# Altium PCB Direct FM modulator test.PcbDoc (part 1 of 2)
Units mm, origin at the board's own origin, x right, y up, seen from the top; angles counter-clockwise.
Board outline 52.5 x 20.32 mm, 4 copper layers (Top Layer, Layer 1, Layer 2, Bottom Layer), stack 1.501 mm thick; 46 components, 41 nets, 156 pads, 97 vias.
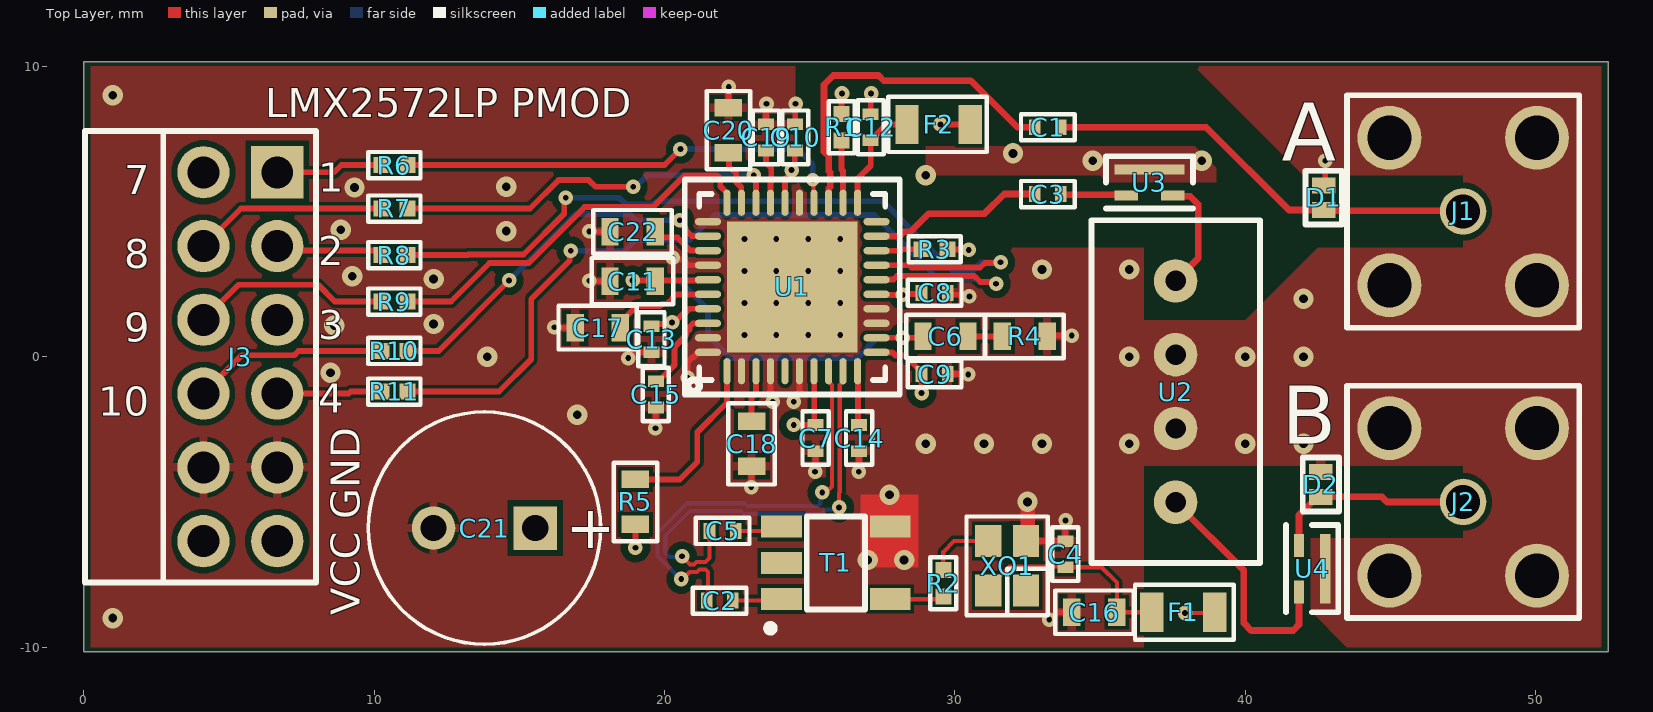
[diagram p0: Top Layer view]
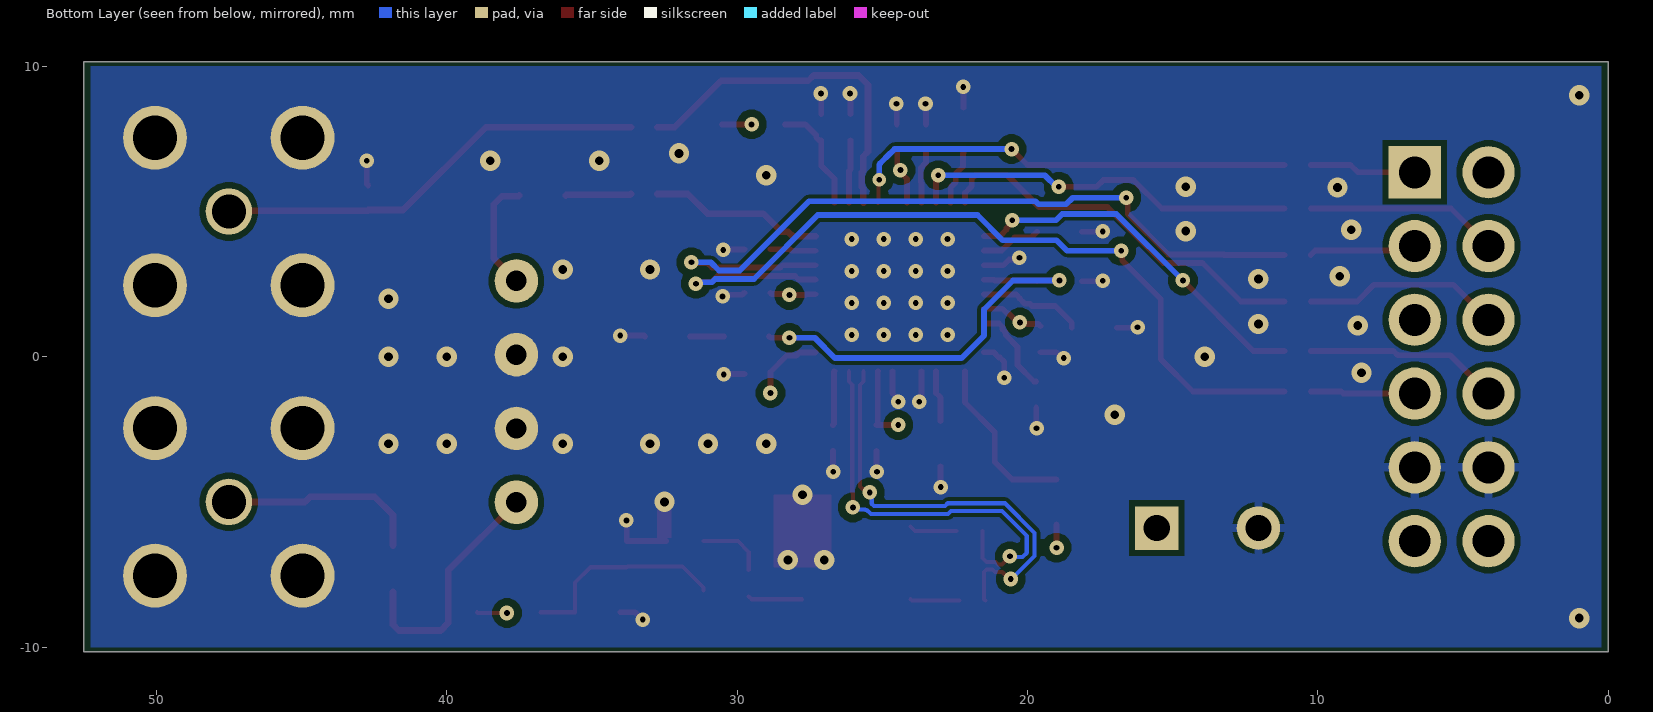
[diagram p1: Bottom Layer view, seen from below]
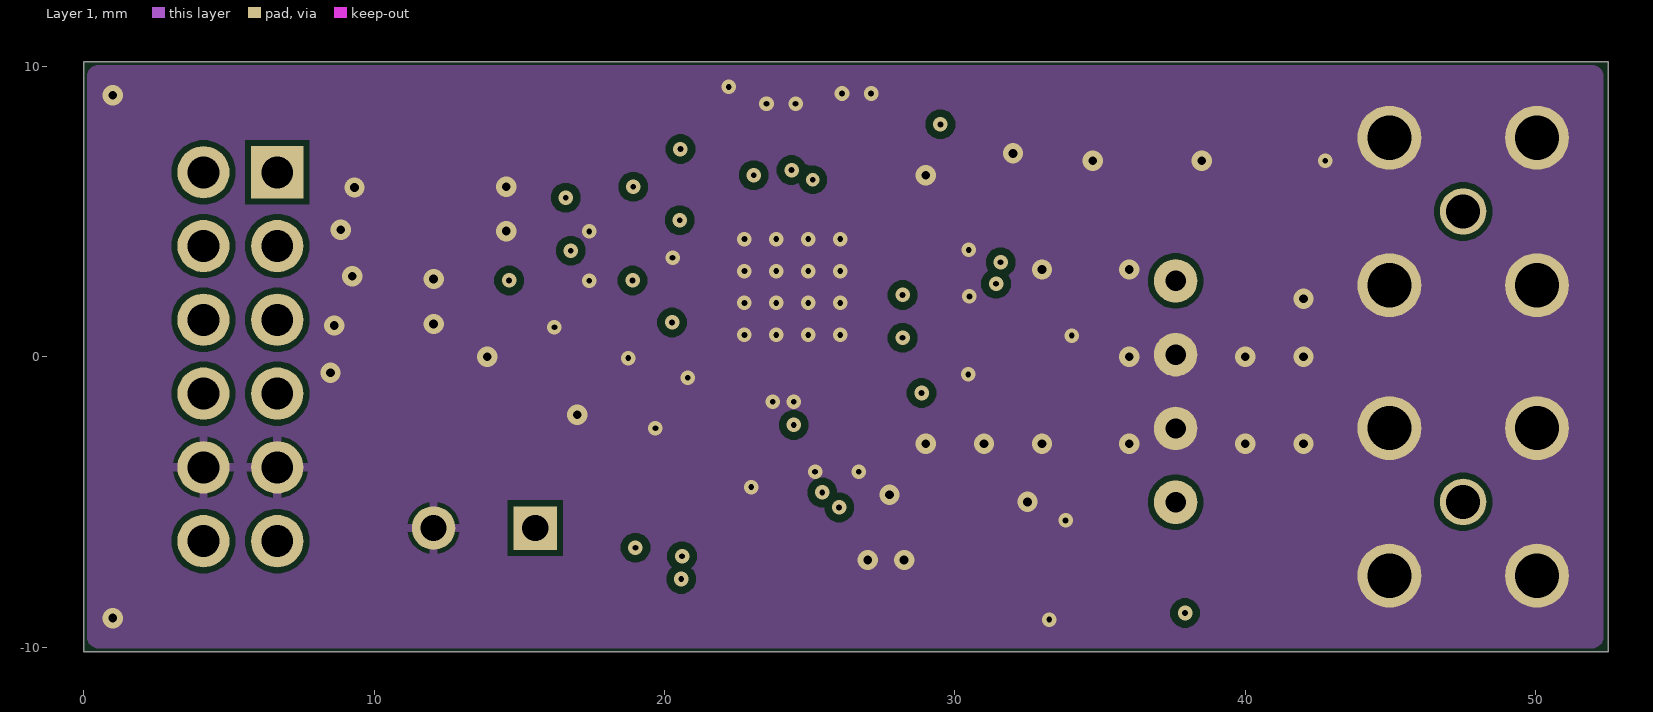
[diagram p2: Layer 1]
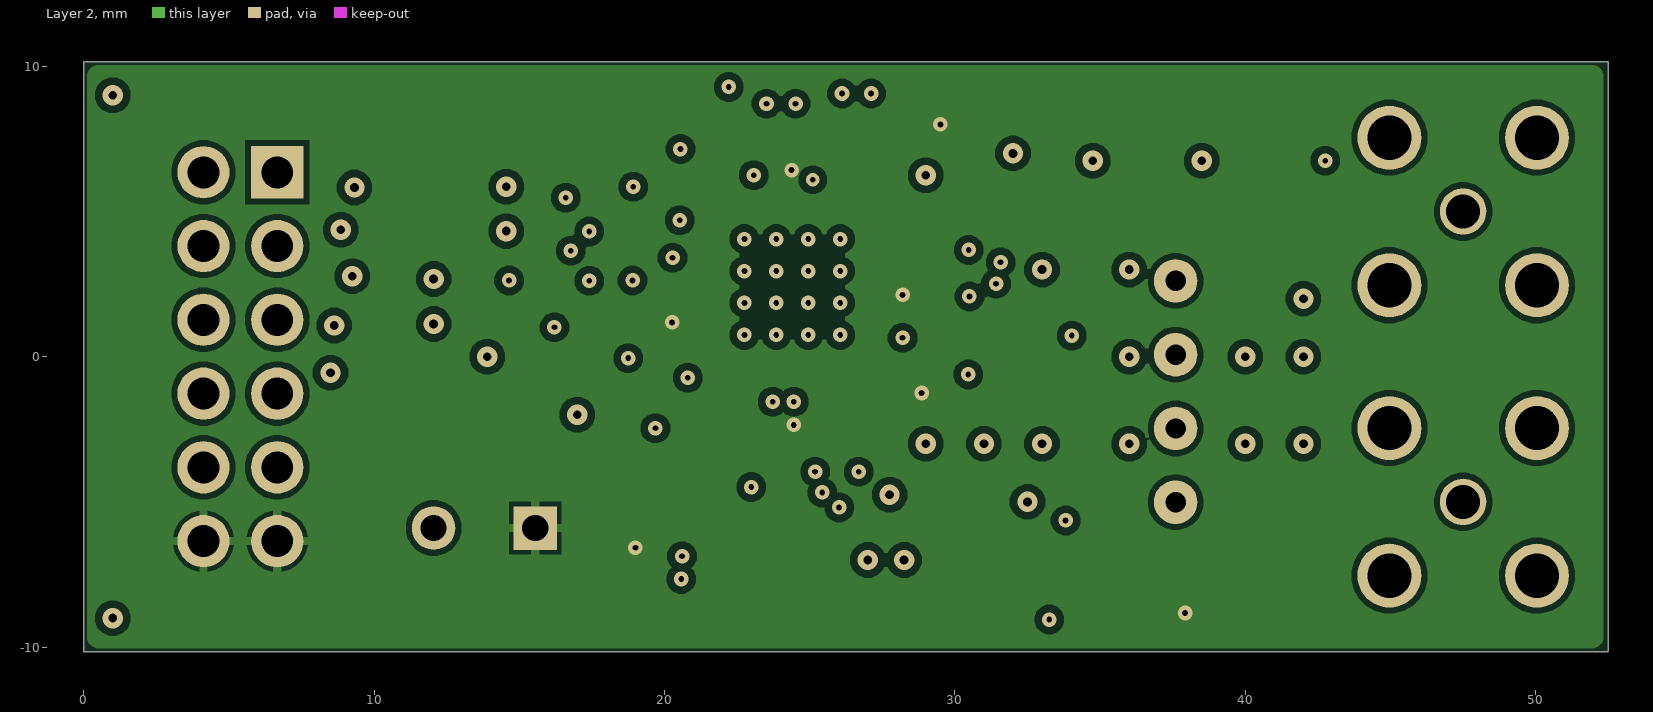
[diagram p3: Layer 2]
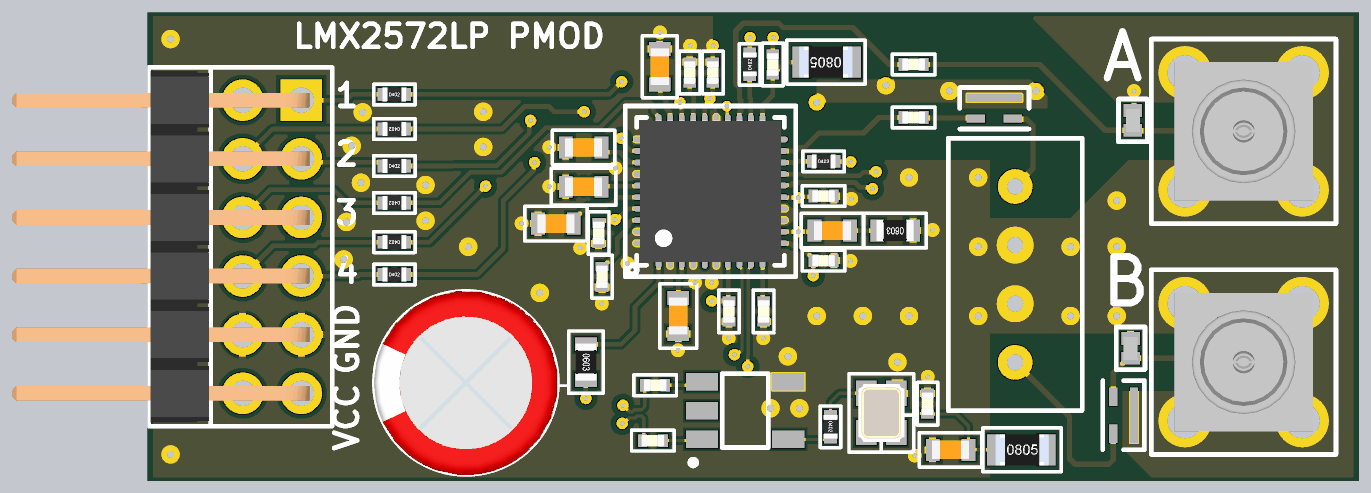
[diagram p4: 3D render of the assembled board from above, using the file's embedded part models]

## Layer stack, top to bottom
Top Solder: solder mask 0.0102, Solder Resist, Dk 3.5
Top Layer: signal copper 0.0356
Dielectric 2: prepreg 0.13, PP-006, Dk 4.1
Layer 1: signal copper 0.035
Dielectric 1: dielectric 1.1, FR-4, Dk 4.8
Layer 2: signal copper 0.035
Dielectric 3: prepreg 0.13, PP-006, Dk 4.1
Bottom Layer: signal copper 0.0356
Bottom Solder: solder mask 0.0102, Solder Resist, Dk 3.5

## Board outline
0,-10.16 0,10.16 52.5,10.16 52.5,-10.16

## Design rules (kind name [scope] priority, off if disabled: settings)
Clearance [All] p1: gap=0.127 ignorepadtopadclearanceinfootprint=FALSE except(0: Arc-Hole Track-Hole SMDPad-Hole THPad-Hole Via-Hole Fill-Hole Poly-Hole Region-Hole Text-Hole; 0.089: Arc-Arc Arc-Track Track-Track; 0.152: Arc-Text Track-Text SMDPad-Text THPad-Text Via-Text Fill-Text Poly-Text Region-Text Text-Text; 0.2: Arc-SMDPad Arc-THPad Track-SMDPad Track-THPad SMDPad-THPad SMDPad-Via THPad-THPad THPad-Fill THPad-Poly THPad-Region; 0.254: Arc-Via Track-Via Via-Via Via-Fill Via-Poly Via-Region; 0.5: THPad-Via)
ComponentClearance [All] p1: gap=0.15 collisioncheckmode=3 verticalgap=0.254 showdistances=FALSE
DiffPairsRouting [All] p1: maxlimit=0.127 minlimit=0.127 mostfreqgap=0.127 toplayer_minwidth=0.141 toplayer_maxwidth=0.141 toplayer_prefwidth=0.141 midlayer1_minwidth=0.06 midlayer1_maxwidth=0.06 midlayer1_prefwidth=0.06 midlayer2_minwidth=0.06 midlayer2_maxwidth=0.06 midlayer2_prefwidth=0.06 bottomlayer_minwidth=0.141 bottomlayer_maxwidth=0.141 bottomlayer_prefwidth=0.141 impedanceprofiledriven=TRUE impedanceprofileid={947369AD-6050-48A7-BECD-DF28348E67A8} impedanceprofilevalue=100.000000 maxuncoupledlength=12.7
HoleSize [All] p1: absolutevalues=TRUE maxlimit=6.3 minlimit=0.2 maxpercent=80.000 minpercent=20.000
HoleToHoleClearance [All] p1: gap=0.5 allowstackedmicrovias=TRUE
MinimumAnnularRing [All] p1: minimumring=0.13
MinimumSolderMaskSliver [All] p1: minsoldermaskwidth=0.2
PlaneConnect [All] p1: planeconnectstyle=Direct reliefexpansion=0.508 reliefentries=4 reliefconductorwidth=0.254 reliefairgap=0.254
PolygonConnect "Free pads to GND" [(ObjectKind = 'Pad') And (Component = 'Free') vs InNet('GND')] p1: connectstyle=Direct reliefconductorwidth=0.254 reliefentries=4 polygonreliefangle="90 Angle" airgapwidth=0.254
PolygonConnect "Footprint connection" [All vs HasFootprint('73366-0061') or HasFootprint('AFS446.0W02-TD01') or HasFootprint('VQFN50P600X600X100_HS-41N') OR HasFootprint('PAT1220')] p2: connectstyle=Direct reliefconductorwidth=0.254 reliefentries=4 polygonreliefangle="90 Angle" airgapwidth=0.254
PolygonConnect "Via connection" [All vs IsVia or IsShieldingVia or IsStitchingVia] p3: connectstyle=Direct reliefconductorwidth=0.254 reliefentries=4 polygonreliefangle="90 Angle" airgapwidth=0.254
PolygonConnect [All] p4: connectstyle=Relief reliefconductorwidth=0.3 reliefentries=4 polygonreliefangle="90 Angle" airgapwidth=0.15
RoutingCorners [All] p1: cornerstyle=45-Degree minsetback=1 maxsetback=2.54
RoutingVias [All] p1: holewidth=0.3 width=0.6 viastyle="Through Hole" minholewidth=0.2 minwidth=0.4 maxholewidth=6 maxwidth=7
SilkToSilkClearance [All] p1: silktosilkclearance=0
SilkToSolderMaskClearance [IsPad] p1: minsilkscreentomaskgap=0.15 clearancetoexposedcopper=TRUE
SolderMaskExpansion SolderMaskExpansion_1 [IsVia] p1: expansion=-0.1 istentingtop=FALSE
SolderMaskExpansion [All] p2: expansion=0.05 istentingtop=FALSE
UnRoutedNet [All] p1: checkbadconnections=TRUE
Width "50 ohm vedeni" [InNetClass('50 ohm')] p1: maxlimit=0.23 minlimit=0.154 preferedwidth=0.23 toplayer_minwidth=0.23 midlayer1_maxwidth=0.154 midlayer1_prefwidth=0.154 midlayer2_maxwidth=0.154 midlayer2_prefwidth=0.154 bottomlayer_minwidth=0.23 impedanceprofiledriven=TRUE impedanceprofileid={8A175896-FBBB-4EFD-AF5E-7F61FA452715} impedanceprofilevalue=50.000000 minimp=50.000000 maximp=50.000000 favimp=50.000000
Width [All] p2: maxlimit=3 minlimit=0.089 preferedwidth=0.2
20 further rules are at their usual default settings.

## Classes and differential pairs
net class "50 ohm": NetD2_1 NetU2_1 NetU2_4 "RF OUT A" "RF OUT A_P" "RF OUT B" "RF OUT B_P"
component class PLL: C1 C2 C3 C4 C5 C6 C7 C8 C9 C10 C11 C12 C13 C14 C15 C16 C17 C18 C19 C20 C22 F1 F2 R1 R2 R3 R4 R5 T1 U1 XO1
component class "Filter and output": D1 D2 J1 J2 U2 U3 U4
component class Connectors: C21 J3 R6 R7 R8 R9 R10 R11
differential pair "OSC IN": +"OSC IN_P" -"OSC IN_N"

## Components (designator, comment, footprint, x,y, rotation, side; value= is the part's Value field where it differs from the comment)
C1 "470p, 50V, C0G" SMD0402 33.2,7.9 r0 top
C2 "1n, 50V, X7R" SMD0402 21.9,-8.4 r180 top
C3 "470p, 50V, C0G" SMD0402 33.2,5.6 r0 top
C4 "1u, 6.3V, X6S" SMD0402 33.8,-6.8 r270 top
C5 "1n, 50V, X7R" SMD0402 22,-6 r180 top
C6 "18n, 35V, C0G" SMD0603 29.675,0.7 r0 top
C7 "1u, 6.3V, X6S" SMD0402 25.2,-2.8 r90 top
C8 "1u, 6.3V, X6S" SMD0402 29.3,2.2 r180 top
C9 "1u, 6.3V, X6S" SMD0402 29.3,-0.6 r180 top
C10 "1u, 6.3V, X6S" SMD0402 24.5,7.55 r270 top
C11 "3n3, 50V, X7R" SMD0603 18.9,2.6 r0 top
C12 "1u, 6.3V, X6S" SMD0402 27.1,7.9 r270 top
C13 "1u, 6.3V, X6S" SMD0402 19.55,0.6 r90 top
C14 "1u, 6.3V, X6S" SMD0402 26.7,-2.8 r90 top
C15 "10n, 50V, X7R" SMD0402 19.7,-1.3 r90 top
C16 "10u, 10V, X6S" SMD0603 34.8,-8.8 r0 top
C17 "10u, 10V, X6S" SMD0603 17.7,1 r0 top
C18 "470n, 50V, X7R" SMD0603 23,-3 r90 top
C19 "100n, 16V, X7R" SMD0402 23.5,7.55 r270 top
C20 "10u, 10V, X6S" SMD0603 22.2,7.8 r270 top
C21 "470uF, ALU 25V" WCAP-ATG8_8x11.5x3.5 13.8,-5.9 r0 top
C22 "10u, 10V, X6S" SMD0603 18.9,4.3 r0 top
D1 "CDDFN2-T5.0LC" CDDFN2-T5.0LC 42.7,5.475 r90 top
D2 "CDDFN2-T5.0LC" CDDFN2-T5.0LC 42.6,-4.4 r90 top
F1 "120 ohm" "SMD0805 - R" 37.9,-8.8 r0 top
F2 "120 ohm" "SMD0805 - R" 29.4,8 r180 top
J1 "MCX 73366-0061" 73366-0061 47.5,5 r0 top
J2 "MCX 73366-0061" 73366-0061 47.5,-5 r0 top
J3 "PMOD M" "PMOD M" 1.397,0 r0 top locked
R1 "49R9, 0.1%" "SMD0402 - R" 26.1,7.9 r90 top
R2 "100R, 1%" "SMD0402 - R" 29.6,-7.8 r270 top
R3 "49R9, 0.1%" "SMD0402 - R" 29.3,3.7 r0 top
R4 "270R, 1%" "SMD0603 - R" 32.4,0.7 r180 top
R5 "10k, 1%" "SMD0603 - R" 19,-5 r270 top
R6 "100R, 1%" "SMD0402 - R" 10.7,6.6 r0 top
R7 "100R, 1%" "SMD0402 - R" 10.7,5.1 r180 top
R8 "100R, 1%" "SMD0402 - R" 10.7,3.5 r0 top
R9 "100R, 1%" "SMD0402 - R" 10.7,1.9 r180 top
R10 "100R, 1%" "SMD0402 - R" 10.7,0.2 r180 top
R11 "100R, 1%" "SMD0402 - R" 10.7,-1.2 r0 top
T1 "MABA-007159-000000" MABA-007159-000000 25.9,-7.1 r90 top
U1 "LMX2572LPRHAT" VQFN50P600X600X100_HS-41N 24.4,2.4 r90 top
U2 "AFS446.0W02-TD01" AFS446.0W02-TD01 37.6,-1.2 r270 top
U3 "PAT1220-C-2DB-T5" PAT1220 36.7,6 r180 top
U4 "PAT1220-C-2DB-T5" PAT1220 42.3,-7.3 r90 top
XO1 "SG-8018CG 25.0000M-TJHPA3" "XO 2.5x2.0mm" 31.8,-7.2 r90 top

## Footprints (in the part's own frame and the unit in brackets; to place one, negate y for a bottom-side part, rotate by r counter-clockwise, add the part's x,y. Pads: shape width x height; smd on the part's side, far side on the other; paste and mask are expansions set on the pad)
73366-0061 [mm]
  round 1.6 hole 1.17: 1(0,0)
  round 2.2 hole 1.52: 2(-2.54,-2.54) 2(-2.54,2.54) 2(2.54,-2.54) 2(2.54,2.54)
  body extent -3,-3 3,3, height 5.5
AFS446.0W02-TD01 [mm]
  round 1.5 hole 0.7: 1(-3.81,0) 2(-1.27,0) 3(1.27,0) 4(3.81,0)
  silkscreen extent -5.9,-2.9 5.9,2.9
CDDFN2-T5.0LC [mm]
  rect 0.55x0.8 smd: 1(-0.425,0) 2(0.425,0)
  silkscreen extent -0.92,-0.63 0.92,0.63, body extent -0.5,-0.3 0.5,0.3, height 0.53
MABA-007159-000000 [mm] "E-Series RF 1:1 Transmission Line Transformer  4.5 - 3000 MHz"
  rect 0.76x1.4 smd: 1(-1.25,1.87) 2(0,1.87) 3(1.25,1.87) 4(1.25,-1.87) 5(-1.25,-1.87)
  silkscreen extent -2.37,-1 1.6,2.37, body extent -1.59,-1.4 1.59,1.39, height 2.6
PAT1220 [mm]
  rect 0.8x0.35 smd: 1(-0.8,0.45) 2(0.8,0.45)
  rect 2.4x0.35 smd: 3(0,-0.45)
  silkscreen extent -1.5,-0.9 1.5,0.9
"PMOD M" [mm] "Pin Header, pitch 2.54 mm, THT, Angled, dual row, 12p"
  rect 1.8x1.8 hole 1.1: 1(5.27,6.35)
  round 1.8 hole 1.1: 2(5.27,3.81) 3(5.27,1.27) 4(5.27,-1.27) 5(5.27,-3.81) 6(5.27,-6.35) 7(2.73,6.35) 8(2.73,3.81) 9(2.73,1.27) 10(2.73,-1.27) 11(2.73,-3.81) 12(2.73,-6.35)
  silkscreen extent -1.35,-7.77 6.6,7.77, body extent -7.27,-7.62 5.63,7.62, height 5.12
SMD0402 [mm] "2-Leads, Body 1,00x0,50mm(0403), IPC Medium Density"
  rect 0.4x0.55 smd: 1(-0.45,0) 2(0.45,0)
  silkscreen extent -0.92,-0.45 0.92,0.45, body extent -0.5,-0.26 0.5,0.27, height 0.36
"SMD0402 - R" [mm] "2-Leads, Body 1,00x0,50mm(0403), IPC Medium Density"
  rect 0.55x0.55 smd: 1(-0.45,0) 2(0.45,0)
  silkscreen extent -0.9,-0.45 0.9,0.45, body extent -0.52,-0.3 0.52,0.3, height 0.34
SMD0603 [mm] "2-Leads, Body 1,60x0,85mm(0603), IPC Medium Density"
  rect 0.6x0.95 smd: 1(-0.775,0) 2(0.775,0)
  silkscreen extent -1.35,-0.75 1.35,0.75, body extent -0.8,-0.4 0.8,0.4, height 0.7
"SMD0603 - R" [mm] "2-Leads, Body 1,60x0,85mm(0603), IPC Medium Density"
  rect 0.6x0.95 smd: 1(-0.775,0) 2(0.775,0)
  silkscreen extent -1.35,-0.75 1.35,0.75, body extent -0.8,-0.45 0.8,0.45, height 0.5
"SMD0805 - R" [mm] "2-Leads, Body 2,00x1,25mm(0805), IPC Medium Density"
  rect 0.8x1.35 smd: 1(-1.125,0) 2(1.05,0)
  silkscreen extent -1.7,-0.95 1.7,0.95, body extent -1.15,-0.67 1.15,0.68, height 0.75
VQFN50P600X600X100_HS-41N [mm] "VQFN, 40-Leads, Body 6.00x6.00mm, Pitch 0.50mm, Thermal Pad 4.50x4.50mm, IPC Medium Density"
  oval 0.9x0.25 smd: 1(-2.9,2.25) 2(-2.9,1.75) 3(-2.9,1.25) 4(-2.9,0.75) 5(-2.9,0.25) 6(-2.9,-0.25) 7(-2.9,-0.75) 8(-2.9,-1.25) 9(-2.9,-1.75) 10(-2.9,-2.25) 21(2.9,-2.25) 22(2.9,-1.75) 23(2.9,-1.25) 24(2.9,-0.75) 25(2.9,-0.25) 26(2.9,0.25) 27(2.9,0.75) 28(2.9,1.25) 29(2.9,1.75) 30(2.9,2.25)
  oval 0.25x0.9 smd: 11(-2.25,-2.9) 12(-1.75,-2.9) 13(-1.25,-2.9) 14(-0.75,-2.9) 15(-0.25,-2.9) 16(0.25,-2.9) 17(0.75,-2.9) 18(1.25,-2.9) 19(1.75,-2.9) 20(2.25,-2.9) 31(2.25,2.9) 32(1.75,2.9) 33(1.25,2.9) 34(0.75,2.9) 35(0.25,2.9) 36(-0.25,2.9) 37(-0.75,2.9) 38(-1.25,2.9) 39(-1.75,2.9) 40(-2.25,2.9)
  rect 4.5x4.5 smd: 41(0,0)
  silkscreen extent -3.7,-3.7 3.7,3.7, body extent -3.06,-3.06 3.06,3.06, height 1
WCAP-ATG8_8x11.5x3.5 [mm] "Aluminum Electrolytic Capacitors, 8x11.5mm"
  rect 1.5x1.5 hole 0.9: 1(1.75,0)
  round 1.5 hole 0.9: 2(-1.75,0)
  silkscreen extent -4,-4 4,4, body extent -3.99,-4 4,4, height 11.81
"XO 2.5x2.0mm" [mm]
  rect 1.1x0.9 smd: 1(-0.85,-0.65) 2(0.85,-0.65) 3(0.85,0.65) 4(-0.85,0.65)
  silkscreen extent -1.7,-1.4 1.7,1.4, body extent -1.25,-1 1.25,1, height 0.8

## Part data
C1 C3: library part GCM1555C1H471FA16D, "Cap Ceramic 470pF 50V C0G 1% Pad SMD 0402 125°C Automotive T/R", Capacitance=470p, Manufacturer=Murata, Supplier Part Number 1=81-GCM1555C1H471FA6D, Category="Ceramic Capacitors", Manufacturer Part Number=GCM1555C1H471FA16D, Pricing 1="1=0.12000, 10=0.06100, 50=0.06100, 100=0.04400, 1000=0.02700, 10000=0.01900 (USD)", RoHS=Yes, Stock 1=34290, Supplier 1=Mouser, Supplier 2=Farnell, Supplier Part Number 2=3582659
C2 C5: library part MC0402B102K500CT, "MULTICOMP - MC0402B102K500CT - CAP, MLCC, X7R, 1NF, 50V, 0402", Capacitance=1n, Capacitance Tolerance="± 10%", Capacitor Terminals=SMD, Ceramic Capacitor Case="0402 [1005 Metric]", Dielectric Characteristic=X7, Manufacturer=MULTICOMP, Operating Temperature Max=125, Operating Temperature Min=-55, Operating Temperature Range="-55°C to +125°C<!--FANDB--><div class=\"features-and-benefits-container\"><div class=\"features-and-benefits-desc-container\"><span class=\"features-and-benefits-container-desc\">SMD Multilayer Ceramic Capacitor, 0402 [1005 Metric], 1000 pF, 50 V, ± 10%, X7R, MC Series</span></div><div class=\"features-and-benefits-description\"><span class=\"features-benefits-value\">The Multicomp MC series is general purpose MLCC capacitors with X7R dielectric material which provides high electrical precision, stability and reliability. This MLCC capacitor consists of a conducting material and electrodes with high density and high efficiency ceramic condensers.</span></div><div class=\"features-and-benefits-list\"><ul class=\"features-and-benefits-list-list\"><li class=\"features-and-benefits-list-item\">Small size with higher capacitance values</li><li class=\"features-and-benefits-list-item\">0201, 0402, 0603, 0805, 1206, 1210, 1812 case sizes available</li><li class=\"features-and-benefits-list-item\">Capacitance value ranging from 100pF to 47?F</li><li class=\"features-and-benefits-list-item\">Capacitor with lead free termination (pure Tin)</li><li class=\"features-and-benefits-list-item\">High electrical precision, stability and reliability</li><li class=\"features-and-benefits-list-item\">Rated voltage of 6.3V, 10V, 16V, 25V, 50V, 100V</li><li class=\"features-and-benefits-list-item\">Operating temperature of -55°C to +125°C</li><li class=\"features-and-benefits-list-item\">Available in ±5%, ±10% and ±20", Supplier Part Number 1=1758991, Voltage Rating=50, Automotive Qualification Standard=-, Capacitance Tolerance ±="± 10%", ComponentLink1Description=http://www.farnell.com/datasheets/1901289.pdf, ComponentLink1URL=http://www.farnell.com/datasheets/1901289.pdf, External Depth=1, External Length / Height=0.5, External Width=0.5, Manufacturer Part Number=MC0402B102K500CT, MSL=-, No. of Pins=2, Packaging="Cut Tape", Pricing 1="10=0,0036, 100=0,0032, 500=0,0029, 2500=0,0021, 5000=0,0018 (GBP)", Product Range="MC Series", RoHS=YES, Stock 1=83283, Supplier 1=Farnell, SVHC="No SVHC (07-Jul-2017)"
C4 C7 C8 C9 C10 C12 C13 C14: library part GRT155C80J105KE01D, "MURATA - GRT155C80J105KE01D - CAP, MLCC, AECQ200, X6S, 1UF, 6.3V, 0402", Capacitance=1u, Capacitance Tolerance="± 10%", Ceramic Capacitor Case="0402 [1005 Metric]", Dielectric Characteristic=X6, Manufacturer=MURATA, Operating Temperature Max=105, Operating Temperature Min=-55, Supplier Part Number 1=2672103, Voltage Rating=6.3, Automotive Qualification Standard=AEC-Q200, ComponentLink1Description=http://www.farnell.com/datasheets/2165909.pdf, ComponentLink1URL=http://www.farnell.com/datasheets/2165909.pdf, Manufacturer Part Number=GRT155C80J105KE01D, MSL="MSL 1 - Unlimited", Packaging="Cut Tape", Pricing 1="10=0,0194, 100=0,0149, 500=0,0108, 2500=0,0079, 5000=0,0069, 10000=0,0062, 50000=0,0048, 100000=0,0047 (GBP)", Product Range="GRT Series", RoHS=YES, Stock 1=19999, Supplier 1=Farnell, SVHC="No SVHC (20-Jun-2016)<!--FANDB--><div class=\"features-and-benefits-container\"><div class=\"features-and-benefits-description\"><span class=\"features-benefits-value\">The GRT155C80J105KE01D from Murata is a GRT series AEC-Q200 automotive-grade monolithic ceramic capacitor. This capacitor meets the AEC-Q200 reliability test standard requirements established by the Automotive Electronics Council. GRT series MLCC capacitors are classified into temperature compensating and high dielectric constant types depending on the change in electrostatic capacitance due to change in temperature. The temperature compensating capacitors feature a small rate of change in electrostatic capacitance as the temperature changes and are used for applications such as filters and high frequency circuit matching. The high dielectric constant capacitors use materials with a high dielectric constant and feature a large electrostatic capacitance. It is designed for use in car multimedia, car interior, car comfort application and general electronic equipment. It is not appropriate for use in applications critical to passenger safety and car driving function (ABS, AIRBAG etc).</span></div><div class=\"features-and-benefits-list\"><ul class=\"features-and-benefits-list-list\"><li class=\"features-and-benefits-list-item\">AEC-Q200 automotive grade qualified</li><li class=\"features-and-benefits-list-item\">Tin plated external electrodes, excellent solderability</li><li class=\"features-and-benefits-list-item\">Capacitance value is 1µF</li><li class=\"features-and-benefits-list-item\">Capacitance tolerance is ±10%</li><li class=\"features-and-benefits-list-item\">Capacitor case size is 0402 [1005 Metric]</li><li class=\"features-and-benefits-list-item\">X6S dielectric material</li><li class=\"features-and-benefits-list-item\">Operating temperature range from -55°C to 105°C</li><li class=\"features-and-benefits-list-item\">Voltage rating is 6.3"
C6: library part C1608C0G1V183J080AC, "Cap Ceramic 0.018uF 35V C0G 5% Pad SMD 0603 125C T/R", Capacitance=18n, Case Code (Imperial)=0603, Case Code (Metric)=1608, Dielectric Material=Ceramic, Manufacturer=TDK, Max Operating Temperature=125°C, Min Operating Temperature=-55°C, Supplier Part Number 1=810-C1608C0G1V183JAC, Tolerance=5%, Voltage Rating=35V, Case/Package=0603, Category="Ceramic Capacitors", ComponentLink1Description=https://product.tdk.com/info/en/catalog/spec/mlccspec_commercial_general_midvoltage_en.pdf?src-supplier=Digi-Key, ComponentLink1URL=https://product.tdk.com/info/en/catalog/spec/mlccspec_commercial_general_midvoltage_en.pdf?src-supplier=Digi-Key, Lead Free="Lead Free", Length=0.063inch, Manufacturer Part Number=C1608C0G1V183J080AC, Mount="Surface Mount", Packaging="Tape and Reel", Pricing 1="1=0.37000, 10=0.16800, 50=0.16800, 100=0.14300, 1000=0.08800, 10000=0.06600 (USD)", RoHS=Yes, RoHS Compliant=Yes, Stock 1=3185, Supplier 1=Mouser, Supplier 2=Farnell, Supplier 3=Digi-Key, Supplier 4=Newark, Supplier Part Number 2=3416084, Supplier Part Number 3=445-174558-1-ND, Supplier Part Number 4=71AH3230, Thickness=0.035inch, Voltage Rating (DC)=35V, Width=0.031inch
C11: library part 0603B332K500CT, "WALSIN - 0603B332K500CT - CAPACITOR, MLCC, X7R, 3300PF, 50V, 0603", Capacitance=3n3, Capacitance Tolerance="± 10%", Ceramic Capacitor Case="0603 [1608 Metric]", Dielectric Characteristic=X7, Manufacturer=WALSIN, Operating Temperature Max=125, Operating Temperature Min=-55, Supplier Part Number 1=2496853, Voltage Rating=50, Automotive Qualification Standard=-, ComponentLink1Description=http://www.farnell.com/datasheets/2340522.pdf, ComponentLink1URL=http://www.farnell.com/datasheets/2340522.pdf, Manufacturer Part Number=0603B332K500CT, MSL="MSL 1 - Unlimited<!--FANDB--><div class=\"features-and-benefits-container\"><div class=\"features-and-benefits-desc-container\"><span class=\"features-and-benefits-container-desc\">SMD Multilayer Ceramic Capacitor, 0603 [1608 Metric], 3300 pF, 50 V, ± 10%, X7R</span></div><div class=\"features-and-benefits-description\"><span class=\"features-benefits-value\">The general purpose series capacitors from Walsin are X7R dielectric multilayer ceramic chip capacitors (MLCC) that provides high electrical precision, stability and reliability. These MLCC capacitors consist of a conducting material and electrodes. The high density and high efficiency ceramic condensers are used to manufacture chip type miniaturized MLCC capacitors.</span></div><div class=\"features-and-benefits-list\"><ul class=\"features-and-benefits-list-list\"><li class=\"features-and-benefits-list-item\">Capacitance values ranges from 100pF to 47?F</li><li class=\"features-and-benefits-list-item\">EIA 0201, 0402, 0603, 0805, 1206, 1210, 1812 case sizes available</li><li class=\"features-and-benefits-list-item\">Available voltage ratings are 6.3V, 10V, 16V, 25V, 35V, 50V, 100V</li><li class=\"features-and-benefits-list-item\">Operating temperature range from -55°C to 125°C</li><li class=\"features-and-benefits-list-item\">Available in ±5%, ±10%, ±20", Packaging="Cut Tape", Pricing 1="10=0,0068, 100=0,0053, 500=0,0038, 1000=0,0031, 2000=0,0027 (GBP)", Product Range=-, RoHS=YES, Stock 1=10797, Supplier 1=Farnell, Supplier 2=Digi-Key, Supplier Part Number 2=BC1249TR-ND
C15: library part MC0402B103K500CT, "MULTICOMP - MC0402B103K500CT - CAP, MLCC, X7R, 0.01UF, 50V, 0402", Capacitance=10n, Capacitance Tolerance="± 10%", Ceramic Capacitor Case="0402 [1005 Metric]", Dielectric Characteristic=X7, Manufacturer=MULTICOMP, Operating Temperature Max=125, Operating Temperature Min=-55, Supplier Part Number 1=2627340, Voltage Rating=50, Automotive Qualification Standard=-, ComponentLink1Description=http://www.farnell.com/datasheets/2117933.pdf, ComponentLink1URL=http://www.farnell.com/datasheets/2117933.pdf, Manufacturer Part Number=MC0402B103K500CT, MSL="MSL 1 - Unlimited", Packaging="Cut Tape", Pricing 1="10=0,0043, 100=0,0039, 500=0,0035, 2500=0,0021, 5000=0,0017 (GBP)", Product Range="MC Series", RoHS=YES, Stock 1=29387, Supplier 1=Farnell, SVHC="No SVHC (12-Jan-2017)<!--FANDB--><div class=\"features-and-benefits-container\"><div class=\"features-and-benefits-desc-container\"><span class=\"features-and-benefits-container-desc\">SMD Multilayer Ceramic Capacitor, 0402 [1005 Metric], 0.01 µF, 50 V, ± 10%, X7R, MC Series</span></div><div class=\"features-and-benefits-description\"><span class=\"features-benefits-value\">The Multicomp MC series are general purpose MLCC (Multilayer Ceramic Capacitor) capacitors with X7R dielectric material which provides high electrical precision, stability and reliability. These MLCC capacitors consists of a conducting material and electrodes with high density and high efficiency ceramic condensers.</span></div><div class=\"features-and-benefits-list\"><ul class=\"features-and-benefits-list-list\"><li class=\"features-and-benefits-list-item\">Small size with higher capacitance values</li><li class=\"features-and-benefits-list-item\">0201, 0402, 0603, 0805, 1206, 1210, 1812 case sizes available</li><li class=\"features-and-benefits-list-item\">Capacitance value ranging from 100pF to 47?F</li><li class=\"features-and-benefits-list-item\">Cu/Ni/Sn termination</li><li class=\"features-and-benefits-list-item\">High electrical precision, stability and reliability</li><li class=\"features-and-benefits-list-item\">Available in 6.3V, 10V, 16V, 25V, 50V and 100V rated voltages</li><li class=\"features-and-benefits-list-item\">Operating temperature of -55°C to +125°C</li><li class=\"features-and-benefits-list-item\">Available in ±5%, ±10% and ±20% tolerances</li><li class=\"features-and-benefits-list-item\">Capacitance characteristic of ±15"
C16 C17 C20 C22: library part GRT188C81A106ME13D, "Cap Ceramic 10uF 10V X6S 20% Pad SMD 0603 105C Automotive T/R", Capacitance=10uF, Case Code (Imperial)=0603, Case Code (Metric)=1608, Manufacturer=Murata, Max Operating Temperature=105°C, Min Operating Temperature=-55°C, Ratings=AEC-Q200, Supplier Part Number 1=81-GRT188C81A106ME3D, Tolerance=20%, Voltage Rating=10V, Case/Package=0603, Category="Ceramic Capacitors", ComponentLink1Description=http://search.murata.co.jp/Ceramy/image/img/A01X/G101/ENG/GRT188C81A106ME13-01.pdf?src-supplier=Digi-Key, ComponentLink1URL=http://search.murata.co.jp/Ceramy/image/img/A01X/G101/ENG/GRT188C81A106ME13-01.pdf?src-supplier=Digi-Key, Length=0.063inch, Manufacturer Part Number=GRT188C81A106ME13D, Mount="Surface Mount", Packaging="Tape and Reel", Pricing 1="1=0.41000, 10=0.20100, 50=0.20100, 100=0.17200, 1000=0.10900, 10000=0.09700 (USD)", RoHS=No, Stock 1=1862, Supplier 1=Mouser, Supplier 2=Farnell, Supplier 3=Digi-Key, Supplier Part Number 2=3582904, Supplier Part Number 3=490-12283-6-ND, Thickness=0.035inch, Width=0.031inch
C18: library part C1608X7R1H474K080AC, "TDK - C1608X7R1H474K080AC - SMD Multilayer Ceramic Capacitor, 0.47 µF, 50 V, 0603 [1608 Metric], ± 10%, X7R, C Series TDK", Capacitance=470n, Case Code (Imperial)=0603, Case Code (Metric)=1608, Dielectric=X7R, Dielectric Material=Ceramic, Manufacturer=TDK, Max Operating Temperature=125°C, Min Operating Temperature=-55°C, Package Quantity=4000, Supplier Part Number 1=810-C1608X7R1H474K, Tolerance=10%, Voltage=50V, Case/Package=0603, Category="Ceramic Capacitors", ComponentLink1Description=https://datasheet.ciiva.com/28693/1735394-28693461.pdf?src-supplier=Element14, ComponentLink1URL=https://datasheet.ciiva.com/28693/1735394-28693461.pdf?src-supplier=Element14, ComponentLink2Description=https://datasheet.ciiva.com/6290/tdkmlcccaprange-6290870.pdf?src-supplier=Digi-Key, ComponentLink2URL=https://datasheet.ciiva.com/6290/tdkmlcccaprange-6290870.pdf?src-supplier=Digi-Key, ComponentLink3Description=https://datasheet.ciiva.com/22718/1904212-22718022.pdf?src-supplier=Element14, ComponentLink3URL=https://datasheet.ciiva.com/22718/1904212-22718022.pdf?src-supplier=Element14, ComponentLink4Description=https://datasheet.ciiva.com/28451/1904212-28451367.pdf?src-supplier=Element14, ComponentLink4URL=https://datasheet.ciiva.com/28451/1904212-28451367.pdf?src-supplier=Element14, ComponentLink5Description=https://datasheet.ciiva.com/6290/tdkmlcccaprange-6290878.pdf?src-supplier=Digi-Key, ComponentLink5URL=https://datasheet.ciiva.com/6290/tdkmlcccaprange-6290878.pdf?src-supplier=Digi-Key, ComponentLink6Description=https://datasheet.ciiva.com/6290/tdkmlcccaprange-6290874.pdf?src-supplier=Digi-Key, ComponentLink6URL=https://datasheet.ciiva.com/6290/tdkmlcccaprange-6290874.pdf?src-supplier=Digi-Key, ComponentLink7Description=https://datasheet.ciiva.com/17487/e412-c-17487386.pdf?src-supplier=Avnet+Europe, ComponentLink7URL=https://datasheet.ciiva.com/17487/e412-c-17487386.pdf?src-supplier=Avnet+Europe, ComponentLink8Description=https://datasheet.ciiva.com/16427/e412-c-16427759.pdf?src-supplier=Future+Electronics, ComponentLink8URL=https://datasheet.ciiva.com/16427/e412-c-16427759.pdf?src-supplier=Future+Electronics, Composition=Ceramic, Depth=0.8mm, Height=0.8mm, Lead Free="Lead Free", Length=1.6mm, Manufacturer Part Number=C1608X7R1H474K080AC, Mount="Surface Mount", Packaging="Tape and Reel", Pricing 1="1=0,28000, 10=0,14200, 100=0,09100, 500=0,07500, 1000=0,06100, 4000=0,04900 (USD)", Radiation Hardening=No, REACH SVHC="No SVHC", RoHS=Yes, Stock 1=163800, Supplier 1=Mouser, Supplier 2=Farnell, Supplier 3=Digi-Key, Supplier Part Number 2=2522012, Supplier Part Number 3=445-5952-1-ND, Termination=SMD/SMT, Thickness=0.037inch, Voltage Rating=50V, Voltage Rating (DC)=50V, Weight=7.1E-05oz, Width=0.031inch
C19: library part MC0402B104K160CT, "MULTICOMP - MC0402B104K160CT - CAP, MLCC, X7R, 100NF, 16V, 0402", Capacitance=100n, Capacitance Tolerance="± 10%", Capacitor Terminals=SMD, Ceramic Capacitor Case="0402 [1005 Metric]", Dielectric Characteristic=X7, Manufacturer=MULTICOMP, Operating Temperature Max=125, Operating Temperature Min=-55, Operating Temperature Range="-55°C to +125°C<!--FANDB--><div class=\"features-and-benefits-container\"><div class=\"features-and-benefits-desc-container\"><span class=\"features-and-benefits-container-desc\">SMD Multilayer Ceramic Capacitor, 0402 [1005 Metric], 0.1 µF, 16 V, ± 10%, X7R, MC Series</span></div><div class=\"features-and-benefits-description\"><span class=\"features-benefits-value\">The Multicomp MC series is general purpose MLCC capacitors with X7R dielectric material which provides high electrical precision, stability and reliability. This MLCC capacitor consists of a conducting material and electrodes with high density and high efficiency ceramic condensers.</span></div><div class=\"features-and-benefits-list\"><ul class=\"features-and-benefits-list-list\"><li class=\"features-and-benefits-list-item\">Small size with higher capacitance values</li><li class=\"features-and-benefits-list-item\">0201, 0402, 0603, 0805, 1206, 1210, 1812 case sizes available</li><li class=\"features-and-benefits-list-item\">Capacitance value ranging from 100pF to 47?F</li><li class=\"features-and-benefits-list-item\">Capacitor with lead free termination (pure Tin)</li><li class=\"features-and-benefits-list-item\">High electrical precision, stability and reliability</li><li class=\"features-and-benefits-list-item\">Rated voltage of 6.3V, 10V, 16V, 25V, 50V, 100V</li><li class=\"features-and-benefits-list-item\">Operating temperature of -55°C to +125°C</li><li class=\"features-and-benefits-list-item\">Available in ±5%, ±10% and ±20", Supplier Part Number 1=1758896, Voltage Rating=16, Automotive Qualification Standard=-, Capacitance Tolerance ±="± 10%", ComponentLink1Description=http://www.farnell.com/datasheets/1901289.pdf, ComponentLink1URL=http://www.farnell.com/datasheets/1901289.pdf, External Depth=1, External Length / Height=0.5, External Width=0.5, Manufacturer Part Number=MC0402B104K160CT, MSL=-, No. of Pins=2, Packaging="Cut Tape", Pricing 1="10=0,0043, 100=0,0039, 500=0,0035, 2500=0,0021, 5000=0,0017 (GBP)", Product Range="MC Series", RoHS=YES, Stock 1=315490, Supplier 1=Farnell, SVHC="No SVHC (07-Jul-2017)"
C21: library part 860010474013, "WURTH ELEKTRONIK - 860010474013 - CAP, ALU ELEC, 470UF, 25V, RADIAL", Capacitance=470u, Capacitance Tolerance="± 20%", Capacitor Terminals="Radial Leaded", Lifetime @ Temperature="2000 hours @ 85", Manufacturer="WURTH ELEKTRONIK", Operating Temperature Max=85, Operating Temperature Min=-40, Supplier Part Number 1=2465681, Voltage Rating=25V, Automotive Qualification Standard=-, ComponentLink1Description=http://www.farnell.com/datasheets/1879524.pdf, ComponentLink1URL=http://www.farnell.com/datasheets/1879524.pdf, Diameter=8, ESR=-, Height=11.5, Lead Spacing=3.5, Manufacturer Part Number=860010474013, MSL="MSL 1 - Unlimited", Packaging="Each<!--FANDB--><div class=\"features-and-benefits-container\"><div class=\"features-and-benefits-desc-container\"><span class=\"features-and-benefits-container-desc\">Electrolytic Capacitor, 470 µF, 25 V, WCAP-ATG8 Series, ± 20%, Radial Leaded, 8 mm</span></div></div>", Pricing 1="1=0.313, 3=0.282, 5=0.257, 10=0.232, 20=0.23, 50=0.189, 250=0.18 (GBP)", Product Range="WCAP-ATG8 Series", RoHS=YES, RoHS Phthalates Compliant=Yes, Stock 1=134, Supplier 1=Farnell, Supplier 2=Digi-Key, Supplier 3=Mouser, Supplier Part Number 2=732-8636-1-ND, Supplier Part Number 3=710-860010474013, SVHC="No SVHC (07-Jul-2017)"
D1 D2: "TVS DIODE 5VWM 25VC DFN2", Breakdown Voltage=7V, Capacitance=12pF, Case/Package=DFN, Clamping Voltage=15V, Leakage Current=1uA, Manufacturer=Bourns, Max Operating Temperature=85°C, Max Surge Current=5A, Min Operating Temperature=-40°C, Operating Supply Voltage=5V, Package Quantity=1, Power Line Protection=No, Resistor Type=Zener, Supplier Part Number 1=652-CDDFN2-T5.0LC, Category="TVS Diodes", ComponentLink1Description=https://datasheet.ciiva.com/6817/1758341-6817680.pdf?src-supplier=Newark, ComponentLink1URL=https://datasheet.ciiva.com/6817/1758341-6817680.pdf?src-supplier=Newark, ComponentLink2Description=https://datasheet.ciiva.com/11193/cddfn2-t5-0lc-11193904.pdf?src-supplier=Avnet, ComponentLink2URL=https://datasheet.ciiva.com/11193/cddfn2-t5-0lc-11193904.pdf?src-supplier=Avnet, ComponentLink3Description=https://datasheet.ciiva.com/4507/cddfn2-txxc-71882-4507683.pdf?src-supplier=Mouser, ComponentLink3URL=https://datasheet.ciiva.com/4507/cddfn2-txxc-71882-4507683.pdf?src-supplier=Mouser, ComponentLink4Description=https://datasheet.ciiva.com/335/cddfn2-t5-0lc-335432.pdf?src-supplier=Digi-Key, ComponentLink4URL=https://datasheet.ciiva.com/335/cddfn2-t5-0lc-335432.pdf?src-supplier=Digi-Key, ComponentLink5Description=https://datasheet.ciiva.com/335/cddfn2-t5-0lc-335433.pdf?src-supplier=Digi-Key, ComponentLink5URL=https://datasheet.ciiva.com/335/cddfn2-t5-0lc-335433.pdf?src-supplier=Digi-Key, ComponentLink6Description=https://datasheet.ciiva.com/335/cddfn2-t5-0lc-335434.pdf?src-supplier=Digi-Key, ComponentLink6URL=https://datasheet.ciiva.com/335/cddfn2-t5-0lc-335434.pdf?src-supplier=Digi-Key, Contact Plating=Gold, Diode Type=ZENER, Direction=Bidirectional, Element Configuration=Single, Length=1mm, Manufacturer Part Number=CDDFN2-T5.0LC, Max Breakdown Voltage=7V, Min Breakdown Voltage=7V, Mount="Surface Mount", Number of Bidirectional Channels=1, Number of Channels=1, Number of Pins=2, Packaging="Tape and Reel", Polarity=Bidirectional, Pricing 1="1=0.43000, 10=0.34500, 50=0.34500, 100=0.24100, 1000=0.15700, 10000=0.14100 (USD)", Radiation Hardening=No, REACH SVHC="No SVHC", Reverse Standoff Voltage=5V, RoHS=Yes, RoHS Compliant=Yes, Series=-, Stock 1=37803, Supplier 1=Mouser, Supplier 2=Farnell, Supplier 3=Digi-Key, Supplier 4="Arrow Electronics", Supplier Part Number 2=1860785, Supplier Part Number 3=CDDFN2-T5.0LCCT-ND, Supplier Part Number 4=CDDFN2-T5.0LC, Termination=SMD/SMT, Working Voltage=5V
F1 F2: library part 742792023, "WURTH ELEKTRONIK - 742792023 - FERRITE BEAD, 0.03OHM, 3A, 0805", DC Current Rating=3, DC Resistance Max=0.03, Ferrite Case Style="0805 [2012 Metric]", Impedance Tolerance="± 25%", Manufacturer="WURTH ELEKTRONIK", Resistance="0.03ohm<!--FANDB--><div class=\"features-and-benefits-container\"><div class=\"features-and-benefits-description\"><span class=\"features-benefits-value\">The 742792023 is a SMD EMI Suppression Ferrite Bead with 0805 case and reliable Ni-Sn electrodes. It can be put directly on the printed circuit board. It offers excellent anti-EMI properties and low DC resistance. Placed very close next to the interference source even with smallest size 0402, maximal impedance at 1000", Supplier Part Number 1=710-742792023, Automotive Qualification Standard=-, ComponentLink1Description=http://www.farnell.com/datasheets/1695980.pdf, ComponentLink1URL=http://www.farnell.com/datasheets/1695980.pdf, ComponentLink2Description=http://www.farnell.com/cad/1670054.zip, ComponentLink2URL=http://www.farnell.com/cad/1670054.zip, Ferrite Mounting=SMD, Impedance @ 100MHz=120, Manufacturer Part Number=742792023, Packaging="Cut Tape", Pricing 1="1=0,123, 50=0,112, 100=0,103, 500=0,0937, 1000=0,0877, 2000=0,0846 (GBP)", Product Range=-, RoHS=YES, Stock 1=4283, Supplier 1=Mouser, Supplier 2=Farnell, Supplier 3=Digi-Key, Supplier Part Number 2=1635732, Supplier Part Number 3=732-1613-1-ND
J1 J2: library part 73366-0061, "CONN MCX JACK STR 50 OHM PCB", Dielectric Material="Polytetrafluoroethylene (PTFE)", Housing Color=Gold, Manufacturer="Molex, LLC", Manufacturer Part Number=0733660061, Operating Temperature="-55°C ~ 155°C", Supplier Part Number 1=538-73366-0061, Body Finish=Gold, Body Material=Brass, Cable Group=-, Category="Connectors, Interconnects", Center Contact Material="Beryllium Copper", Center Contact Plating=Gold, ComponentLink1Description=https://www.molex.com/pdm_docs/sd/733660061_sd.pdf, ComponentLink1URL=https://www.molex.com/pdm_docs/sd/733660061_sd.pdf, Connector Style=MCX, Connector Type="Jack, Female Socket", Contact Termination=Solder, Fastening Type=Snap-On, Features=-, Impedance="50 Ohm", Includes=-, Ingress Protection=-, Insertion Loss=-, Mating Cycles=500, Mounting Feature=-, Mounting Type="Through Hole", Packaging=Tray, Part Status=Active, Pricing 1="1=1.95, 10=1.765, 25=1.6572, 50=1.5854, 100=1.5133, 250=1.36916, 500=1.26106, 1000=1.0809, 2500=1.00884 (USD)", RoHS="RoHS Compliant", Shield Termination=Solder, Stock 1=39394, Supplier 1=Mouser, Supplier 2=Digi-Key, Supplier 3=Farnell, Supplier Part Number 2=WM5541-ND, Supplier Part Number 3=1909245
J3: "WR-PHD 2.54 mm THT Angled Dual Pin Header, 12 pins", Color=Black, Manufacturer="Wurth Electronics", Manufacturer Part Number=61301221021, Supplier Part Number 1=710-61301221021, Category=Connectors, ComponentLink1Description=https://katalog.we-online.de/em/datasheet/6130xx21021.pdf?src-supplier=Digi-Key, ComponentLink1URL=https://katalog.we-online.de/em/datasheet/6130xx21021.pdf?src-supplier=Digi-Key, ComponentLink2Description=http://www.farnell.com/cad/1737270.pdf?src-supplier=Element14, ComponentLink2URL=http://www.farnell.com/cad/1737270.pdf?src-supplier=Element14, Connector Type="Male Pin", Contact Material=Copper, Contact Mating Length=0.236inch, Contact Plating=Gold, Gender=Male, Mount="Through Hole", Number of Contacts=12, Number of Positions=12, Number of Rows=2, Packaging=Bulk, Pitch=0.1inch, Pricing 1="1=0.94000, 10=0.79300, 50=0.55100, 100=0.50100, 1000=0.45500, 10000=0.45500 (USD)", REACH SVHC=Unknown, RoHS=Yes, RoHS Compliant=Yes, Row Spacing=0.1inch, Supplier 1=Mouser, Supplier 2=Farnell, Supplier 3=Digi-Key, Supplier 4=RSComponents, Supplier Part Number 2=2356197, Supplier Part Number 3=732-5354-ND, Supplier Part Number 4=8281711, Termination=Solder
R1 R3: library part AT0402BRD0749R9L, "Thin Film Resistors - SMD 49.9 Ohms 0.1% Tol. AEC-Q200", Case Code - in=0402, Case Code - mm=1005, Manufacturer=Yageo, Maximum Operating Temperature="+ 125 C", Minimum Operating Temperature="- 55 C", Operating Temperature Range="- 55 C to + 125 C", Package / Case="0402 (1005 metric)", Power Rating="62.5 mW (1/16 W)", Resistance="49.9 Ohms", Supplier Part Number 1=603-AT0402BRD0749R9L, Temperature Coefficient="25 PPM / C", Tolerance="0.1 %", Voltage Rating="50 V", Brand=Yageo, Category="Thin Film Resistors - SMD", CNHTS=8533211000, ComponentLink1Description=http://www.mouser.com/datasheet/2/447/PYu-AT_51_RoHS_L_5-1222714.pdf, ComponentLink1URL=http://www.mouser.com/datasheet/2/447/PYu-AT_51_RoHS_L_5-1222714.pdf, Diameter=-, Features=-, Height="0.3 mm", HTS Code=8533210030, Length="1 mm", Manufacturer Part Number=AT0402BRD0749R9L, Minimum Order Quantity=1, Mounting Style="PCB Mount", MXHTS=85332101, Packaging="Cut Tape", Pricing 1="1=0.594, 10=0.346, 100=0.139, 1000=0.106, 2500=0.081, 10000=0.079, 20000=0.077 (EUR)", Product="Thin Film Resistors SMD", Product Type="Thin Film Resistors", Qualification=AEC-Q200, Reeling=True, RoHS="RoHS Compliant", RoHS - Mouser=Y, Series=AT, Standard Pack Qty=10000, Stock 1=9662, Subcategory=Resistors, Supplier 1=Mouser, TARIC=8533210000, Termination Style=SMD/SMT, Type="High Precision High Stability Chip Resistors", Width="0.5 mm"
R2 R6 R7 R8 R9 R10 R11: library part RC0402FR-07100RL, "YAGEO - RC0402FR-07100RL - RES, 100R, 1%, 0.0625W, 0402, THICK FILM", Manufacturer=YAGEO, Operating Temperature Max=155, Operating Temperature Min=-55, Power Rating=62.5, Resistance=100, Resistance Tolerance="± 1%", Resistor Case Style="0402 [1005 Metric]", Resistor Element Material="Thick Film", Supplier Part Number 1=9239111, Temperature Coefficient="± 100", Voltage Rating=50, Automotive Qualification Standard=-, ComponentLink1Description=http://www.farnell.com/datasheets/2167052.pdf, ComponentLink1URL=http://www.farnell.com/datasheets/2167052.pdf, Manufacturer Part Number=RC0402FR-07100RL, MSL="MSL 1 - Unlimited", Pricing 1="10=0.385, 100=0.38, 500=0.285, 2500=0.144, 5000=0.121 (EUR)", Product Range="RC Series", Reel Quantity="10000<!--FANDB--><div class=\"features-and-benefits-container\"><div class=\"features-and-benefits-desc-container\"><span class=\"features-and-benefits-container-desc\">SMD Chip Resistor, 0402 [1005 Metric], 100 ohm, RC Series, 50 V, Thick Film, 62.5 mW</span></div><div class=\"features-and-benefits-description\"><span class=\"features-benefits-value\">The Yageo RC_L series resistors are general purpose thick film chip resistors with lead free terminations made by thick film process. The resistance range includes E24 and E96 decade values from 1ohm to 100Mohm. These resistors are constructed on top of a high grade ceramic body.</span></div><div class=\"features-and-benefits-list\"><ul class=\"features-and-benefits-list-list\"><li class=\"features-and-benefits-list-item\">EIA 0075, 0100, 0201, 0402, 0603, 0805, 1206, 1210, 1218, 2010, 2512 case sizes available</li><li class=\"features-and-benefits-list-item\">Small chip sizes save PCB space</li><li class=\"features-and-benefits-list-item\">Rated voltage range of 10V to 200V</li><li class=\"features-and-benefits-list-item\">Maximum power rating of 2W</li><li class=\"features-and-benefits-list-item\">Available in ±0.1%, ±0.5%, ±1% and ±5% tolerance</li><li class=\"features-and-benefits-list-item\">High component and equipment reliability</li><li class=\"features-and-benefits-list-item\">Forbidden materials are not used in products/production</li><li class=\"features-and-benefits-list-item\">-55°C to 155°C temperature range for RC0402 to RC2512 and -55°C to 125°C for RC0075 to RC0201", RoHS=YES, Stock 1=260492, Supplier 1=Farnell, Supplier 2=Mouser, Supplier Part Number 2=603-RC0402FR-07100RL, SVHC="No SVHC (27-Jun-2018)"
R4: library part WR06X2700FTL, "WALSIN - WR06X2700FTL - RES, THICK FILM, 270R, 1%, 75V, 0603", Manufacturer=WALSIN, Power Rating=100, Resistance=270R, Resistance Tolerance="± 1%", Resistor Case Style="0603 [1608 Metric]", Resistor Element Material="Thick Film", Supplier Part Number 1=2502438, Temperature Coefficient="± 100", Voltage Rating=75, Automotive Qualification Standard=-, ComponentLink1Description=http://www.farnell.com/datasheets/1960319.pdf, ComponentLink1URL=http://www.farnell.com/datasheets/1960319.pdf, Manufacturer Part Number=WR06X2700FTL, MSL="MSL 2 - 1 year<!--FANDB--><div class=\"features-and-benefits-container\"><div class=\"features-and-benefits-desc-container\"><span class=\"features-and-benefits-container-desc\">SMD Chip Resistor, 270 ohm, 75 V, 0603 [1608 Metric], 100 mW, ± 1%, WR06 Series</span></div><div class=\"features-and-benefits-description\"><span class=\"features-benefits-value\">The WR06 series resistors from Walsin are general purpose thick film chip resistors. These resistors are constructed in a high grade ceramic body (aluminium oxide).</span></div><div class=\"features-and-benefits-list\"><ul class=\"features-and-benefits-list-list\"><li class=\"features-and-benefits-list-item\">Resistance range includes E24 and E96 decade values from 1ohm to 10Mohm</li><li class=\"features-and-benefits-list-item\">EIA 0603 case size</li><li class=\"features-and-benefits-list-item\">Available in ?±100ppm/°C and -200ppm/°C to +400ppm/°C TCR values</li><li class=\"features-and-benefits-list-item\">Available in ±1% and ±5% tolerance</li><li class=\"features-and-benefits-list-item\">High reliability and stability</li><li class=\"features-and-benefits-list-item\">Higher component and equipment reliability</li><li class=\"features-and-benefits-list-item\">Lower assembly costs</li><li class=\"features-and-benefits-list-item\">Reduced size of final equipment</li><li class=\"features-and-benefits-list-item\">Continuous working voltage is 75V and rated power is 100", Packaging="Cut Tape", Pricing 1="10=0.0132, 100=0.0044, 500=0.0027, 1000=0.0019, 2500=0.0014 (GBP)", Product Range="WR06 Series", RoHS=YES, Stock 1=6379, Supplier 1=Farnell
R5: library part RC0603FR-0710KL, "YAGEO (PHYCOMP) - RC0603FR-0710KL - RES, THICK FILM, 10K, 1%, 0.1W, 0603", Manufacturer="YAGEO (PHYCOMP)", Power Rating=100, Resistance=10k, Resistance Tolerance="± 1%", Resistor Case Style="0603 [1608 Metric]", Resistor Element Material="Thick Film", Supplier Part Number 1=603-RC0603FR-0710KL, Temperature Coefficient="± 100", Voltage Rating=50, Automotive Qualification Standard=-, ComponentLink1Description=http://past.yageo.com/pdf/PYu-R_Packing_6.pdf, ComponentLink1URL=http://past.yageo.com/pdf/PYu-R_Packing_6.pdf, ComponentLink2Description=http://www.farnell.com/datasheets/2167052.pdf, ComponentLink2URL=http://www.farnell.com/datasheets/2167052.pdf, Manufacturer Part Number=RC0603FR-0710KL, MSL="MSL 1 - Unlimited<!--FANDB--><div class=\"features-and-benefits-container\"><div class=\"features-and-benefits-desc-container\"><span class=\"features-and-benefits-container-desc\">SMD Chip Resistor, Thick Film, 10 kohm, 50 V, 0603 [1608 Metric], 100 mW, ± 1", Packaging="Tape & Reel", Pricing 1="5000=0.0025, 25000=0.0014, 50000=0.0013 (GBP)", Product Range="RC Series", RoHS=YES, Stock 1=9995, Supplier 1=Mouser, Supplier 2=Farnell, Supplier 3=Digi-Key, Supplier Part Number 2=2421850, Supplier Part Number 3=311-10.0KHRCT-ND, SVHC="No SVHC (20-Jun-2016)"
T1: "Transformator 4.5-3000MHz IL 2dB Impedance Ratio 1:1", Frequency Range="4.5MHz ~ 3GHz", Manufacturer="M/A-Com Technology Solutions", Package / Case="6-SMD (5 Leads), Flat Lead", Supplier Part Number 1=937-MABA007159000000, Category="RF/IF and RFID", ComponentLink1Description=http://cdn.macom.com/datasheets/MABA-007159-000000.pdf, ComponentLink1URL=http://cdn.macom.com/datasheets/MABA-007159-000000.pdf, Datasheet=http://www.mouser.com/ds/2/249/MABA-007159-000000-318068.pdf, Impedance - Unbalanced/Balanced=1:1, Insertion Loss (Max)=3.5dB, Manufacturer Part Number=MABA-007159-000000, Mounting Type="Surface Mount", Name=MABA-007159-000000, Packaging="Cut Tape (CT)", Phase Difference=-, Pricing 2="1=1.72, 10=1.379, 25=1.1208, 50=1.092, 100=1.0633, 250=1.03456, 500=1.02592, 1000=0.90811 (USD)", Return Loss (Min)=-, RoHS="RoHS Compliant", Stock 2=26395, Supplier 1=Mouser, Supplier 2=Digi-Key, Supplier Part Number 2=1465-1302-1-ND
U1: "2-GHz Low Power Wideband RF Synthesizer With FSK Modulation 40-VQFN -40 to 85", Case/Package=VQFN, Manufacturer="Texas Instruments", Max Frequency=2GHz, Max Operating Temperature=85°C, Min Operating Temperature=-40°C, Supplier Part Number 1=595-LMX2572LPRHAT, Category="Clock Generators, PLLs, Frequency Synthesizers", ComponentLink1Description=http://www.ti.com/general/docs/suppproductinfo.tsp?distId=10&amp;gotoUrl=http%3A%2F%2Fwww.ti.com%2Flit%2Fgpn%2Flmx2572lp&src-supplier=Digi-Key, ComponentLink1URL=http://www.ti.com/general/docs/suppproductinfo.tsp?distId=10&amp;gotoUrl=http%3A%2F%2Fwww.ti.com%2Flit%2Fgpn%2Flmx2572lp&src-supplier=Digi-Key, ComponentLink2Description=http://www.ti.com/lit/ds/symlink/lmx2572lp.pdf?src-supplier=Digi-Key, ComponentLink2URL=http://www.ti.com/lit/ds/symlink/lmx2572lp.pdf?src-supplier=Digi-Key, Input=Clock, Manufacturer Part Number=LMX2572LPRHAT, Mount="Surface Mount", Number of Circuits=1, Packaging="Tape and Reel", PLL=Yes, Pricing 1="1=14.10000, 10=12.96000, 50=12.43000, 100=10.95000, 1000=10.40000, 10000=10.40000 (USD)", RoHS=Yes, RoHS Compliant=Yes, Stock 1=77, Supplier 1=Mouser, Supplier 2="Arrow Electronics", Supplier 3=Digi-Key, Supplier Part Number 2=LMX2572LPRHAT, Supplier Part Number 3=296-51375-1-ND
U2: "Saw Filters 446MHz", Frequency=446MHz, Manufacturer=Abracon, Max Operating Temperature=80°C, Min Operating Temperature=-40°C, Supplier Part Number 1=815-AFS446.0W2-TD1, Voltage Rating (DC)=10V, Category="EMI / RFI Components", ComponentLink1Description=https://datasheet.ciiva.com/4548/afs446-0w02-td01-43048-4548368.pdf?src-supplier=Mouser, ComponentLink1URL=https://datasheet.ciiva.com/4548/afs446-0w02-td01-43048-4548368.pdf?src-supplier=Mouser, Impedance=50R, Insertion Loss=4.5dB, Manufacturer Part Number=AFS446.0W02-TD01, Pricing 1="1=0.93000, 10=0.85800, 50=0.70100, 100=0.57200, 1000=0.48600, 10000=0.34600 (USD)", RoHS=Yes, RoHS Compliant=Yes, Stock 1=608, Supplier 1=Mouser, Termination=Radial
U3 U4: "Chip Attenuator 10GHz 2dB, 100mW", Attenuation Value=2dB, Case Code (Imperial)=0805, Case Code (Metric)=2012, Frequency=10GHz, Manufacturer=Susumu, Max Operating Temperature=125°C, Max Power Dissipation=100mW, Min Operating Temperature=-55°C, Package Quantity=1, Supplier Part Number 1=754-PAT1220C-2DBT5, Case/Package=0805, Category=Uncategorized, ComponentLink1Description=https://datasheet.ciiva.com/15101/getdatasheetpartid-497046-15101143.pdf?src-supplier=Verical, ComponentLink1URL=https://datasheet.ciiva.com/15101/getdatasheetpartid-497046-15101143.pdf?src-supplier=Verical, ComponentLink2Description=https://datasheet.ciiva.com/2788/products-38-2788379.pdf?src-supplier=Digi-Key, ComponentLink2URL=https://datasheet.ciiva.com/2788/products-38-2788379.pdf?src-supplier=Digi-Key, ComponentLink3Description=https://datasheet.ciiva.com/24156/products-38-24156863.pdf?src-supplier=Future+Electronics, ComponentLink3URL=https://datasheet.ciiva.com/24156/products-38-24156863.pdf?src-supplier=Future+Electronics, ComponentLink4Description=https://datasheet.ciiva.com/2788/products-38-2788377.pdf?src-supplier=Digi-Key, ComponentLink4URL=https://datasheet.ciiva.com/2788/products-38-2788377.pdf?src-supplier=Digi-Key, ComponentLink5Description=https://datasheet.ciiva.com/2788/products-38-2788378.pdf?src-supplier=Digi-Key, ComponentLink5URL=https://datasheet.ciiva.com/2788/products-38-2788378.pdf?src-supplier=Digi-Key, Impedance=50R, Lead Free="Lead Free", Manufacturer Part Number=PAT1220-C-2DB-T5, Mount="Surface Mount", Number of Pins=3, Packaging="Tape and Reel", Power Rating=100mW, Pricing 1="1=0.35000, 10=0.30800, 25=0.27800, 100=0.24300, 250=0.21300, 500=0.18800, 1000=0.14800, 5000=0.12500, 10000=0.12000 (USD)", RoHS=Yes, Stock 1=17229, Supplier 1=Mouser
XO1: "Oscillator XO 25MHz ±50ppm 15pF CMOS 55% 1.8V/2.5V/3.3V 4-Pin SMD T/R", Freq=25MHz, Manufacturer=Epson, Supplier Part Number 1=732-CG25M-TJHPA3, ComponentLink1Description=http://datasheet.octopart.com/SG-8018CG-25.0000M-TJHPA3-Epson-datasheet-137868109.pdf?src-supplier=Future+Electronics, ComponentLink1URL=http://datasheet.octopart.com/SG-8018CG-25.0000M-TJHPA3-Epson-datasheet-137868109.pdf?src-supplier=Future+Electronics, Manufacturer Part Number="SG-8018CG 25.0000M-TJHPA3", Pricing 1="1=1,11000, 10=1,03000, 100=0,88700, 250=0,88700, 500=0,78900, 1000=0,72700 (USD)", Stock 1=221, Supplier 1=Mouser, Supplier 2=Arrow, Supplier 3="Future Electronics", Supplier Part Number 2="SG-8018CG 25.0000M-TJHPA3", Supplier Part Number 3="SG-8018CG 25.0000M-TJHPA3-REEL"

## Via types
v1: diameter 0.5, hole 0.2, Top Layer to Bottom Layer, 63 vias
v2: diameter 0.7, hole 0.3, Top Layer to Bottom Layer, 33 vias
v3: diameter 0.46, hole 0.2, Top Layer to Bottom Layer, 1 vias